# EAGLE board durtest3 (EAGLE 6.0)
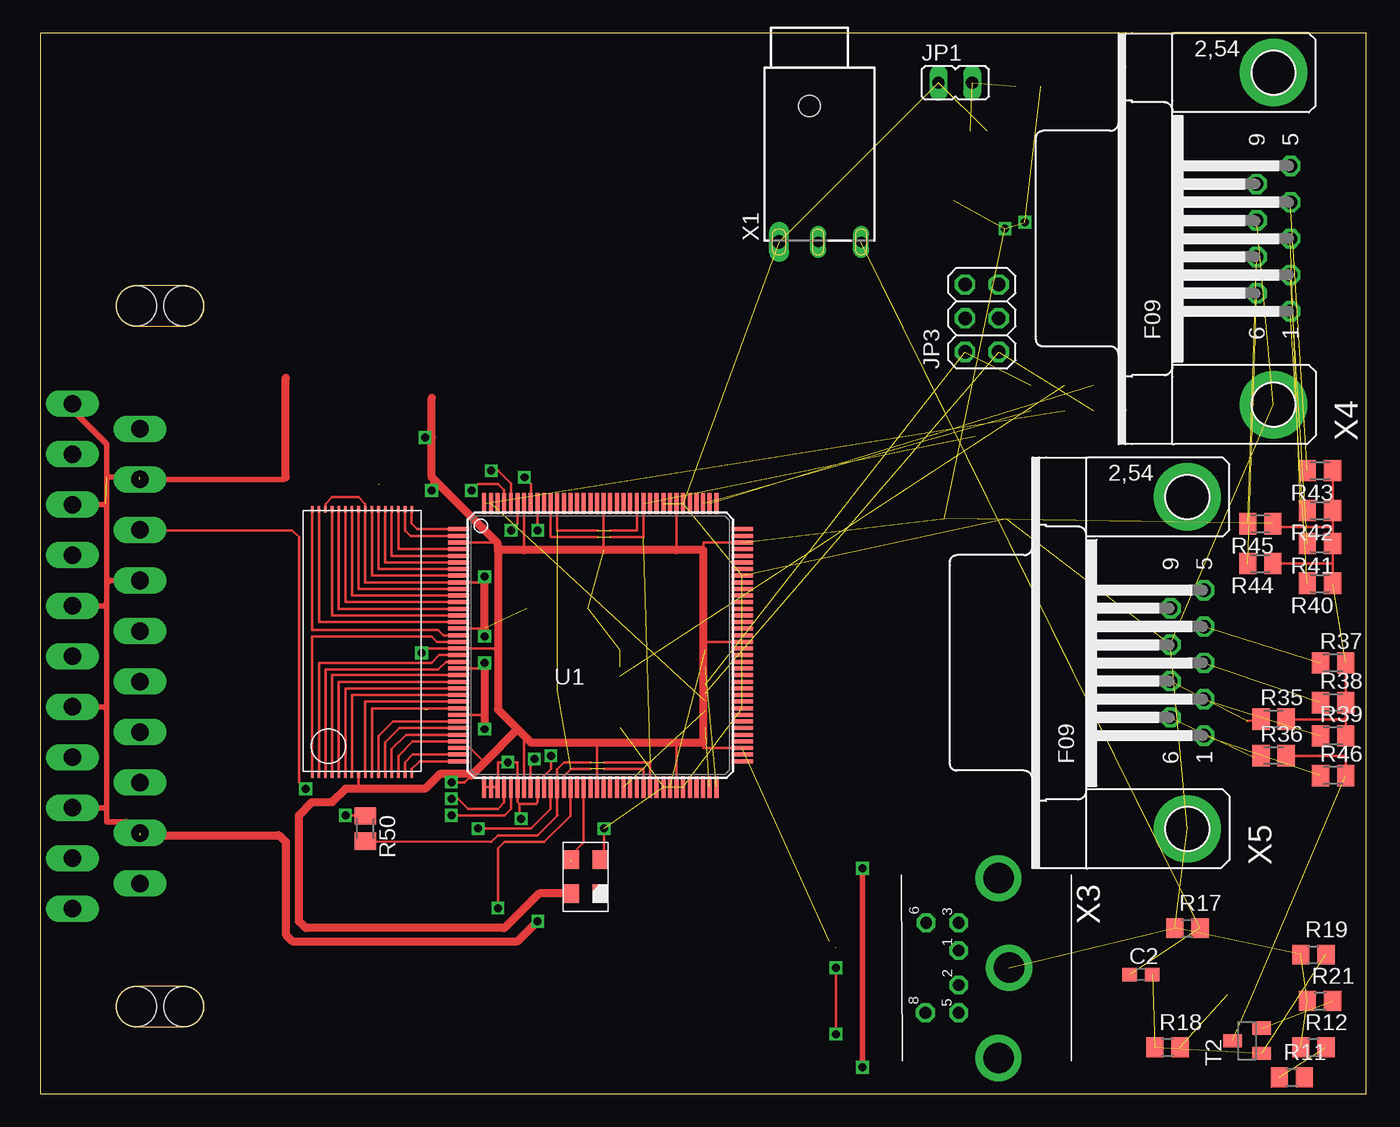
[diagram p0: board, top side]
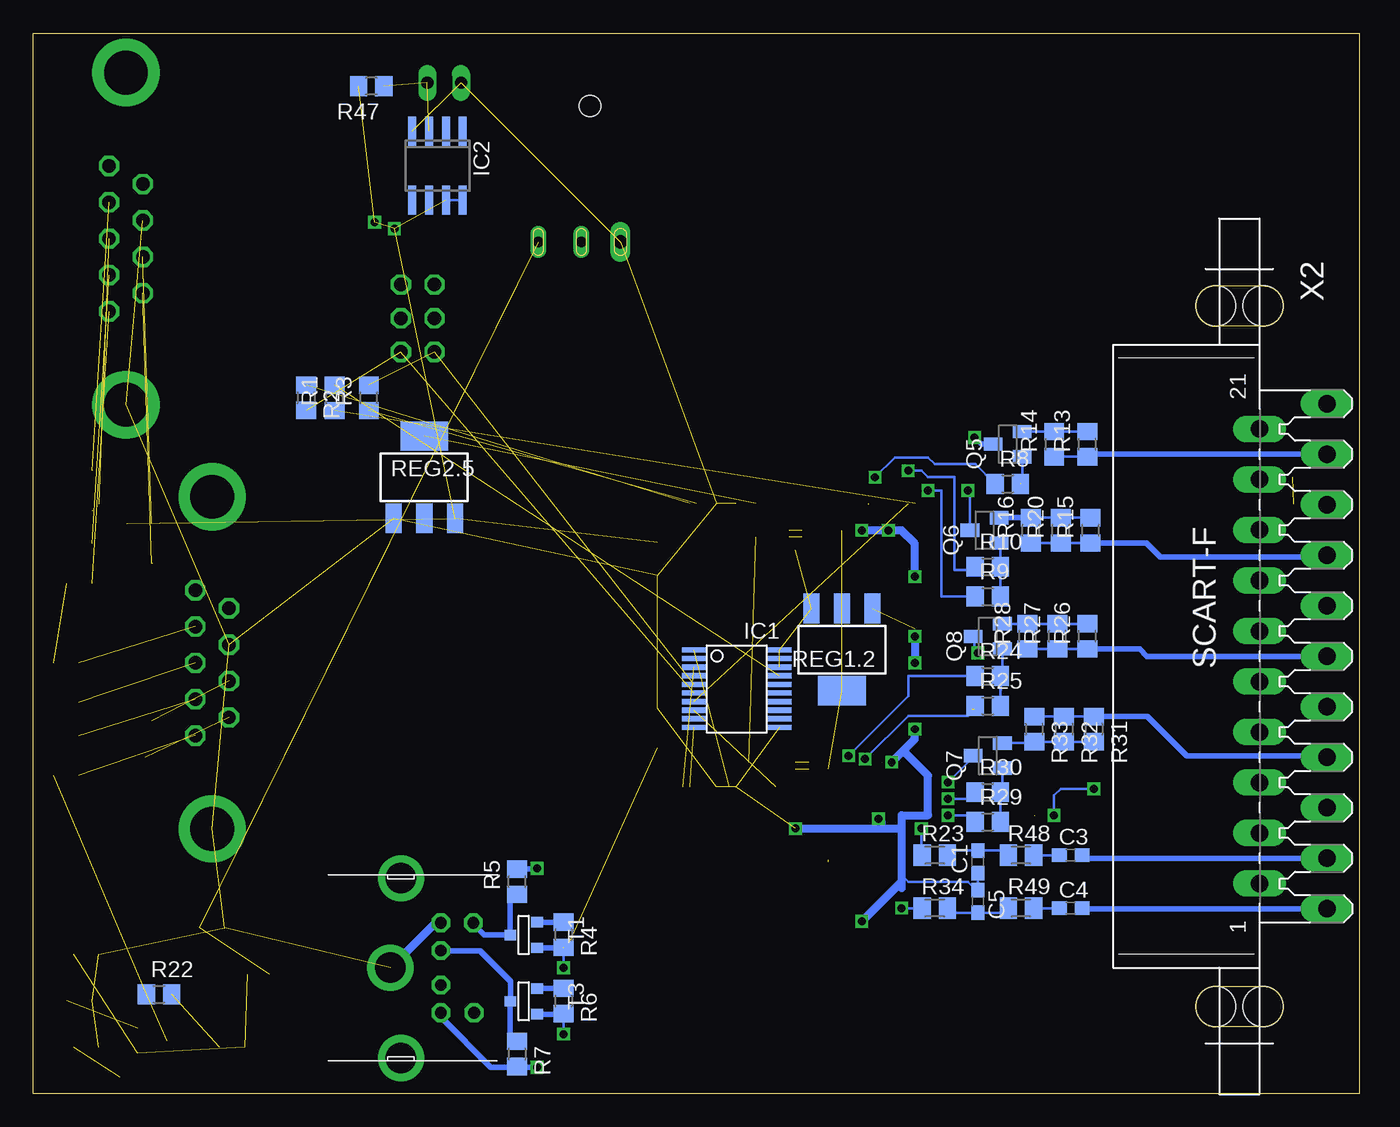
[diagram p1: board, bottom side, seen from below]

Size 100 x 80 mm. Coordinates in mm from the lower left corner, seen from the top.
Outline: 0,0 100,0 100,80 0,80 0,0
Copper layers (1*16): Top 0.0356mm / dielectric 1.5011mm / Bottom 0.0356mm
Design rules: minimum track width 6mil, minimum drill 13mil, track to track 6mil, track to pad 6mil, pad to pad 6mil, via to via 6mil, smd to smd 6mil, copper to edge 15mil, drill to drill 6mil, minimum pad ring 7mil, minimum via ring 7mil, stop-mask expansion 4mil, vias tented up to drill 0mil, thermal gap 10mil
Net classes: 1 power: width 0.6 mm, drill 1.1 mm, clearance 0.4 mm

## Footprints (pad centres in the part's own frame; a part is rotated, then mirrored left to right if it is on the bottom)
C0603 = smd 1.1 x 1: 1 -0.85,0; 2 0.85,0
VO20 = smd 0.4 x 1.8: 1 5.85,6.15; 2 5.2,6.15; 3 4.55,6.15; 4 3.9,6.15; 5 3.25,6.15; 6 2.6,6.15; 7 1.95,6.15; 8 1.3,6.15; 9 0.65,6.15; 10 0,6.15; 11 0,-0.3; 12 0.65,-0.3; 13 1.3,-0.3; 14 1.95,-0.3; 15 2.6,-0.3; 16 3.25,-0.3; 17 3.9,-0.3; 18 4.55,-0.3; 19 5.2,-0.3; 20 5.85,-0.3
SO-08 = smd 0.6 x 2.2: 1 -1.905,-2.6; 2 -0.635,-2.6; 3 0.635,-2.6; 4 1.905,-2.6; 5 1.905,2.6; 6 0.635,2.6; 7 -0.635,2.6; 8 -1.905,2.6
JP1 = drill 0.914 long: 1 0,-1.27; 2 0,1.27
2X03 = drill 1.016 octagon: 1 -2.54,-1.27; 2 -2.54,1.27; 3 0,-1.27; 4 0,1.27; 5 2.54,-1.27; 6 2.54,1.27
SOT23 = smd 1 x 1.4: 1 -0.95,-1.1; 2 0.95,-1.1; 3 0,1.1
R0805 = smd 1.3 x 1.5: 1 -0.95,0; 2 0.95,0
M0805 = smd 1.3 x 1.6: 1 -0.95,0; 2 0.95,0
SOT223 = smd 1.219 x 2.235: 1 -2.311,-3.099; 2 0,-3.099; 3 2.311,-3.099 | smd 3.6 x 2.2: 4 0,3.099
SOT-23 = smd 0.787 x 0.889: 1 0.025,-1.016; 2 -0.94,1.016; 3 0.991,1.016
TQ144 = smd 1.6 x 0.3: P1 -10.7,8.75; P2 -10.7,8.25; P3 -10.7,7.75; P4 -10.7,7.25; P5 -10.7,6.75; P6 -10.7,6.25; P7 -10.7,5.75; P8 -10.7,5.25; P9 -10.7,4.75; P10 -10.7,4.25; P11 -10.7,3.75; P12 -10.7,3.25; P13 -10.7,2.75; P14 -10.7,2.25; P15 -10.7,1.75; P16 -10.7,1.25; P17 -10.7,0.75; P18 -10.7,0.25; P19 -10.7,-0.25; P20 -10.7,-0.75; P21 -10.7,-1.25; P22 -10.7,-1.75; P23 -10.7,-2.25; P24 -10.7,-2.75; P25 -10.7,-3.25; P26 -10.7,-3.75; P27 -10.7,-4.25; P28 -10.7,-4.75; P29 -10.7,-5.25; P30 -10.7,-5.75; P31 -10.7,-6.25; P32 -10.7,-6.75; P33 -10.7,-7.25; P34 -10.7,-7.75; P35 -10.7,-8.25; P36 -10.7,-8.75; P73 10.7,-8.75; P74 10.7,-8.25; P75 10.7,-7.75; P76 10.7,-7.25; P77 10.7,-6.75; P78 10.7,-6.25; P79 10.7,-5.75; P80 10.7,-5.25; P81 10.7,-4.75; P82 10.7,-4.25; P83 10.7,-3.75; P84 10.7,-3.25; P85 10.7,-2.75; P86 10.7,-2.25; P87 10.7,-1.75; P88 10.7,-1.25; P89 10.7,-0.75; P90 10.7,-0.25; P91 10.7,0.25; P92 10.7,0.75; P93 10.7,1.25; P94 10.7,1.75; P95 10.7,2.25; P96 10.7,2.75; P97 10.7,3.25; P98 10.7,3.75; P99 10.7,4.25; P100 10.7,4.75; P101 10.7,5.25; P102 10.7,5.75; P103 10.7,6.25; P104 10.7,6.75; P105 10.7,7.25; P106 10.7,7.75; P107 10.7,8.25; P108 10.7,8.75 | smd 0.3 x 1.6: P37 -8.75,-10.7; P38 -8.25,-10.7; P39 -7.75,-10.7; P40 -7.25,-10.7; P41 -6.75,-10.7; P42 -6.25,-10.7; P43 -5.75,-10.7; P44 -5.25,-10.7; P45 -4.75,-10.7; P46 -4.25,-10.7; P47 -3.75,-10.7; P48 -3.25,-10.7; P49 -2.75,-10.7; P50 -2.25,-10.7; P51 -1.75,-10.7; P52 -1.25,-10.7; P53 -0.75,-10.7; P54 -0.25,-10.7; P55 0.25,-10.7; P56 0.75,-10.7; P57 1.25,-10.7; P58 1.75,-10.7; P59 2.25,-10.7; P60 2.75,-10.7; P61 3.25,-10.7; P62 3.75,-10.7; P63 4.25,-10.7; P64 4.75,-10.7; P65 5.25,-10.7; P66 5.75,-10.7; P67 6.25,-10.7; P68 6.75,-10.7; P69 7.25,-10.7; P70 7.75,-10.7; P71 8.25,-10.7; P72 8.75,-10.7; P109 8.75,10.7; P110 8.25,10.7; P111 7.75,10.7; P112 7.25,10.7; P113 6.75,10.7; P114 6.25,10.7; P115 5.75,10.7; P116 5.25,10.7; P117 4.75,10.7; P118 4.25,10.7; P119 3.75,10.7; P120 3.25,10.7; P121 2.75,10.7; P122 2.25,10.7; P123 1.75,10.7; P124 1.25,10.7; P125 0.75,10.7; P126 0.25,10.7; P127 -0.25,10.7; P128 -0.75,10.7; P129 -1.25,10.7; P130 -1.75,10.7; P131 -2.25,10.7; P132 -2.75,10.7; P133 -3.25,10.7; P134 -3.75,10.7; P135 -4.25,10.7; P136 -4.75,10.7; P137 -5.25,10.7; P138 -5.75,10.7; P139 -6.25,10.7; P140 -6.75,10.7; P141 -7.25,10.7; P142 -7.75,10.7; P143 -8.25,10.7; P144 -8.75,10.7
TSOP32 = smd 0.5 x 0.2: P1 -9.75,3.75; P2 -9.75,3.25; P3 -9.75,2.75; P4 -9.75,2.25; P5 -9.75,1.75; P6 -9.75,1.25; P7 -9.75,0.75; P8 -9.75,0.25; P9 -9.75,-0.25; P10 -9.75,-0.75; P11 -9.75,-1.25; P12 -9.75,-1.75; P13 -9.75,-2.25; P14 -9.75,-2.75; P15 -9.75,-3.25; P16 -9.75,-3.75; P17 10.25,-3.75; P18 10.25,-3.25; P19 10.25,-2.75; P20 10.25,-2.25; P21 10.25,-1.75; P22 10.25,-1.25; P23 10.25,-0.75; P24 10.25,-0.25; P25 10.25,0.25; P26 10.25,0.75; P27 10.25,1.25; P28 10.25,1.75; P29 10.25,2.25; P30 10.25,2.75; P31 10.25,3.25; P32 10.25,3.75
OSC_7C = smd 1.4 x 1.2: ENA -1.27,-1.1; GND 1.27,-1.1; OUT 1.27,1.1; VDD -1.27,1.1
1503_04 = drill 0.8 pad 1.2 long: 1 3.9,-10.25; 2 0.65,-10.25 | drill 1 pad 1.2 long: 3 -2.3,-10.25 | hole 1.6: 0,0
SCART-F = drill 1.321 long: 1 19.05,5.08; 2 17.145,0; 3 15.24,5.08; 4 13.335,0; 5 11.43,5.08; 6 9.525,0; 7 7.62,5.08; 8 5.715,0; 9 3.81,5.08; 10 1.905,0; 11 0,5.08; 12 -1.905,0; 13 -3.81,5.08; 14 -5.715,0; 15 -7.62,5.08; 16 -9.525,0; 17 -11.43,5.08; 18 -13.335,0; 19 -15.24,5.08; 20 -17.145,0; 21 -19.05,5.08 | hole 3.023: 26.416,0.254; 26.416,-3.302; -26.416,0.254; -26.416,-3.302
M_DIN6 = drill 0.9 pad 1.422 octagon: 1 -1.3,-3.75; 2 1.3,-3.75; 3 -3.4,-3.75; 5 3.4,-3.75; 6 -3.4,-6.2; 8 3.4,-6.25 | drill 2.3 pad 3.5: SH1 6.8,-0.75; SH2 0,0.05; SH3 -6.75,-0.75
F09HP = drill 1.016 octagon: 1 -5.486,-1.27; 2 -2.743,-1.27; 3 0,-1.27; 4 2.743,-1.27; 5 5.486,-1.27; 6 -4.115,1.27; 7 -1.372,1.27; 8 1.372,1.27; 9 4.115,1.27 | drill 3.302 pad 5.08: G1 -12.522,0; G2 12.522,0

## Placement (x,y rotation side)
C1  [C0603]  28.75,17.5 90 bottom
C2  100nF  [C0603]  83,9 0 top
C3  [C0603]  21.75,18 0 bottom
C4  [C0603]  21.75,14 0 bottom
C5  [C0603]  28.75,14.5 270 bottom
IC1  XCF02S  [VO20]  44.02,27.63 90 bottom
IC2  25LC080SN  [SO-08]  69.5,70 180 bottom
JP1  [JP1]  69,76.25 270 top
JP3  [2X03]  71,58.5 90 top
Q5  BC848SMD  [SOT23]  26.5,49 90 bottom
Q6  BC848SMD  [SOT23]  28.25,42.5 90 bottom
Q7  BC848SMD  [SOT23]  28,25.5 90 bottom
Q8  BC848SMD  [SOT23]  28,34.5 90 bottom
R1  100  [R0805]  77.25,52.49 90 bottom
R2  100  [R0805]  79.42,52.5 270 bottom
R3  100  [R0805]  74.68,52.49 90 bottom
R4  1000  [R0805]  60,12 270 bottom
R5  1000  [R0805]  63.5,16 90 bottom
R6  1000  [R0805]  60,7 270 bottom
R7  1000  [R0805]  63.5,3 270 bottom
R8  2200  [R0805]  26.5,46 0 bottom
R9  2200  [R0805]  28,37.5 0 bottom
R10  1000  [R0805]  28,39.75 0 bottom
R11  75  [R0805]  94.38,1.25 0 top
R12  750  [R0805]  96,3.5 0 top
R13  680  [R0805]  20.5,49 90 bottom
R14  2200  [R0805]  23,49 90 bottom
R15  270  [R0805]  20.25,42.5 90 bottom
R16  680  [R0805]  24.75,42.5 90 bottom
R17  10000  [R0805]  86.5,12.5 0 top
R18  4700  [R0805]  85,3.5 0 top
R19  10000  [R0805]  96,10.5 0 top
R20  4700  [R0805]  22.5,42.5 90 bottom
R21  47000  [R0805]  96.5,7 0 top
R22  1000  [R0805]  90.5,7.5 0 bottom
R23  [M0805]  32,18 0 bottom
R24  2200  [R0805]  28,31.5 0 bottom
R25  1000  [R0805]  28,29.25 0 bottom
R26  270  [R0805]  20.5,34.5 90 bottom
R27  680  [R0805]  22.75,34.5 90 bottom
R28  4700  [R0805]  25,34.5 90 bottom
R29  2200  [R0805]  28,20.5 0 bottom
R30  1000  [R0805]  28,22.75 0 bottom
R31  270  [R0805]  20,27.5 270 bottom
R32  680  [R0805]  22.25,27.5 270 bottom
R33  4700  [R0805]  24.5,27.5 270 bottom
R34  [M0805]  32,14 0 bottom
R35  [M0805]  93,28.25 0 top
R36  [M0805]  93,25.5 0 top
R37  [M0805]  97.5,32.5 0 top
R38  [M0805]  97.5,29.5 0 top
R39  [M0805]  97.5,27 0 top
R40  [M0805]  96.5,38.5 180 top
R41  [M0805]  96.5,41.5 180 top
R42  [M0805]  96.5,44 180 top
R43  [M0805]  96.5,47 180 top
R44  [M0805]  92,40 180 top
R45  [M0805]  92,43 180 top
R46  [M0805]  97.5,24 0 top
R47  4K7  [R0805]  74.5,76 180 bottom
R48  [M0805]  25.5,18 0 bottom
R49  [M0805]  25.5,14 0 bottom
R50  2k2  [M0805]  24.5,20 270 top
REG1.2  1.2V  [SOT223]  39,33.5 180 bottom
REG2.5  2.5V  [SOT223]  70.5,46.5 0 bottom
T1  BSS138  [SOT-23]  63,12 270 bottom
T2  BC848  [SOT23]  91,4 90 top
T3  BSS138  [SOT-23]  63,7 270 bottom
U1  XC3S400TQ144  [TQ144]  42.23,33.83 0 top
U$1  AS6C4008  [TSOP32]  24.25,33.83 90 top
U$2  TXO_7C  [OSC_7C]  41.12,16.38 90 top
X1  1503_04  [1503_04]  58,74.5 0 top
X2  SCART-F  [SCART-F]  7.5,33 270 bottom
X3  [M_DIN6]  73,9.5 270 top
X4  [F09HP]  93,64.5 90 top
X5  [F09HP]  86.5,32.5 90 top

## Library data of the parts
C1-C5 R23 R34-R46 R48-R50 = resistor
IC1 = smd-special
IC2 = microchip; MF: MICROCHIP; MPN: 25LC080/SN; OC_FARNELL: 1137302; OC_NEWARK: 96K4092
JP1 = jumper
JP3 = pinhead
Q5-Q8 = bc548
R1-R22 R24-R33 R47 = rcl
REG1.2 REG2.5 U$1 U$2 = cpcfpga
T1 T3 = zetex; OC_FARNELL: unknown; OC_NEWARK: unknown
T2 = transistor
U1 = xilinx_spartan3_virtex4_and_5
X1 = con-lumberg; OC_FARNELL: 1216981; OC_NEWARK: unknown
X2 = con-hirschmann; OC_FARNELL: unknown; OC_NEWARK: unknown
X3 = mini_din
X4 X5 = con-subd; OC_FARNELL: unknown; OC_NEWARK: unknown

## Nets
AINLEFT: X2.6
AINRIGHT: X2.2
B0: R30.1 U1.P40
B1: R29.1 U1.P41
CASIN: R21.2 T2.2
CLK_5V: R5.1 T1.1 X3.6
COMPIN: X2.20
CSYNC: R8.1 U1.P137
D_FASTBLANKING: R11.1 R12.2
DATA_5V: R7.1 T3.1 X3.1
FPGA_AUDIO_LEFT: R23.1 U1.P47
FPGA_AUDIO_RIGHT: R34.1 U1.P50
G0: R25.1 U1.P44
G1: R24.1 U1.P46
GND: C1.1 C5.1 IC1.11 IC2.4 JP1.1 R12.1 R17.1 R19.1 R21.1 REG1.2.1 REG2.5.1 U1.P9 U1.P16 U1.P22 U1.P29 U1.P37 U1.P38 U1.P39 U1.P42 U1.P45 U1.P64 U1.P67 U1.P81 U1.P88 U1.P94 U1.P101 U1.P114 U1.P117 U1.P136 U1.P139 U$1.P24 U$1.P30 U$2.GND X1.3 X2.4 X2.5 X2.9 X2.13 X2.14 X2.17 X2.18 X2.21 X3.3 X3.SH2 X4.8 X4.G1 X5.8 X5.G1
N$1: U1.P1 U$1.P17
N$2: U1.P2 U$1.P18
N$3: U1.P4 U$1.P19
N$4: U1.P5 U$1.P20
N$5: U1.P6 U$1.P21
N$6: U1.P7 U$1.P22
N$7: U1.P8 U$1.P23
N$8: U1.P10 U$1.P25
N$9: U1.P11 U$1.P26
N$10: U1.P12 U$1.P27
N$11: U1.P13 U$1.P28
N$12: U1.P14 U$1.P29
N$13: U1.P15 U$1.P31
N$14: U1.P17 U$1.P32
N$15: U1.P18 U$1.P1
N$16: U1.P20 U$1.P2
N$17: U1.P21 U$1.P3
N$18: U1.P23 U$1.P4
N$19: U1.P24 U$1.P5
N$20: U1.P25 U$1.P6
N$21: U1.P26 U$1.P7
N$22: U1.P27 U$1.P9
N$23: U1.P28 U$1.P10
N$24: U1.P30 U$1.P11
N$25: U1.P31 U$1.P12
N$26: U1.P32 U$1.P13
N$27: U1.P33 U$1.P14
N$28: U1.P35 U$1.P15
N$29: U1.P36 U$1.P16
N$30: R35.1 X5.7
N$31: R36.1 X5.6
N$32: R37.1 X5.4
N$33: R38.1 X5.3
N$34: R39.1 X5.2
N$35: IC1.3 U1.P72
N$36: IC1.17 R1.2
N$37: R46.1 X5.1
N$38: IC1.10 U1.P71
N$39: R2.1 U1.P110
N$40: IC1.7 U1.P143
N$41: R40.2 X4.1
N$42: R1.1 U1.P144
N$43: R3.1 U1.P111
N$44: R41.2 X4.2
N$45: R42.2 X4.3
N$46: R43.2 X4.4
N$47: R44.2 X4.6
N$48: R45.2 X4.7
N$49: IC2.3 JP1.2 R47.1
N$50: U1.P52 U$2.OUT
N$51: C1.2 R23.2 R48.1
N$52: C3.1 R48.2
N$53: Q6.1 R9.2 R10.2
N$54: Q6.2 R15.2 R16.2 R20.2
N$55: Q8.1 R24.2 R25.2
N$56: Q8.2 R26.2 R27.2 R28.2
N$57: Q7.1 R29.2 R30.2
N$58: Q7.2 R31.2 R32.2 R33.2
N$59: Q5.2 R13.2 R14.2
N$60: C2.2 R18.1 R19.2 T2.1
N$61: C2.1 R17.2 X1.1
N$62: R18.2 R22.2
N$63: Q5.1 R8.2
N$64: C4.1 R49.2
N$65: C5.2 R34.2 R49.1
N$68: JP3.3
N$69: JP3.5
N$70: JP3.6
N$72: JP3.4
PE1: X3.SH1
PE3: X3.SH3
PROM_DO: IC1.1 U1.P65
PROM_INITB: IC1.8 U1.P58
PS2CLK: R4.1 T1.2
PS2DAT: R6.1 T3.2
R0: R10.1 U1.P140
R1: R9.1 U1.P141
SCART_BLANKING: R50.1 X2.16
SCART_BLUE: R31.1 R32.1 R33.1 X2.7
SCART_COMP: R13.1 R14.1 X2.19
SCART_GREEN: R26.1 R27.1 R28.1 X2.11
SCART_LEFT: C3.2 X2.3
SCART_MODE: X2.8
SCART_RED: R15.1 R16.1 R20.1 X2.15
SCART_RIGHT: C4.2 X2.1
SPI_CLK: IC2.6
SPI_DI: IC2.5
SPI_DO: IC2.2
SPI_SEL0: IC2.1
TCK: IC1.6 JP3.1 R2.2
TDI: IC1.4
TDO: U1.P109
TMS: IC1.5 JP3.2 R3.2
VCC: IC1.18 IC1.19 IC1.20 IC2.7 IC2.8 Q5.3 Q6.3 Q7.3 Q8.3 R4.2 R6.2 R22.1 R35.2 R36.2 R37.2 R38.2 R39.2 R40.1 R41.1 R42.1 R43.1 R44.1 R45.1 R46.2 R47.2 REG1.2.3 REG2.5.3 T1.3 T2.3 T3.3 U1.P3 U1.P19 U1.P34 U1.P43 U1.P54 U1.P66 U1.P75 U1.P91 U1.P106 U1.P115 U1.P126 U1.P138 U$1.P8 U$2.VDD
VCC_5V: R5.2 R7.2 X3.5
VCC_B3: R11.2
VCCAUX: R50.2 REG2.5.4 U1.P48 U1.P62 U1.P120 U1.P134
VCCINT: REG1.2.4 U1.P49 U1.P61 U1.P121 U1.P133

## Tracks (layer width: path | path; a pad name or v marks a point on that pad's centre or on a via)
B0  (via drill 0.6)
  Top 0.2: U1.P40 34.98,21.98 34.5,21.5 32.25,21.5 31.5,22.25 v31,22.25
  Bottom 0.2: 28.95,22.5 R30.1 29.45,22.25 v31,22.25
B1  (via drill 0.6)
  Top 0.2: U1.P41 35.48,21.48 35,21 v31,21
  Bottom 0.2: 29.45,21 R29.1 28.95,21 v31,21
CASIN  (1 unrouted)
CLK_5V
  Bottom 0.3: 64.02,14.53 R5.1
  Bottom 0.4: X3.6 66.8,12.8 66,12 64.04,12 T1.1 64.02,14.53
CSYNC  (via drill 0.6)  (1 unrouted)
  Top 0.2: 37,44.5 37,46 v36.5,46.5
  Bottom 0.2: 27.45,46.5 R8.1 28.95,47.5 32,47.5 32.5,48 35,48 v36.5,46.5
D_FASTBLANKING  (1 unrouted)
DATA_5V
  Bottom 0.4: R7.1 64.02,4.47 T3.1 64,6.99 64,8.5 66.3,10.8 X3.1
FPGA_AUDIO_LEFT  (via drill 0.6)
  Top 0.2: U1.P47 38.48,21.48 37,20 v33,20
  Bottom 0.2: R23.1 33,18.05 v33,20
FPGA_AUDIO_RIGHT  (via drill 0.6)
  Top 0.2: U1.P50 39.98,20.98 38,19 35,19 34.5,18.5 v34.5,14
  Bottom 0.2: v34.5,14 R34.1
G0  (via drill 0.6)  (1 unrouted)
  Top 0.2: U1.P44 36.98,24.98 v37.25,25.25
  Bottom 0.2: 29.2,29 R25.1 | v37.25,25.25 34,28.5 29.5,28.5 29,29
G1  (via drill 0.6)
  Top 0.2: U1.P46 37.98,23.98 38.5,24.5 v38.5,25.5
  Bottom 0.2: v38.5,25.5 34,30 34,31.5 R24.1
GND  (via drill 0.6)  (27 unrouted)
  Top 0.2: U$1.P30 21.5,44.5 22,45 24,45 24.5,44.5 U$1.P24 24.5,38.58 U1.P9 33.5,38.58 33.5,38.5 | U1.P16 33.5,35.08 33.5,35 | U1.P22 33.5,32.08 33.5,32 | U1.P29 33.5,28.58 | U1.P37 U1.P38 U1.P39 34.5,23.16 34.5,25 v35.25,25 36,25 | U1.P45 37.5,23.11 37.5,22 37.38,21.88 36.12,21.88 | 36,23.16 U1.P42 | U1.P42 35.98,24.98 | 36.12,21.88 36,22 36,23.11 U1.P42 | v37.5,42.5 37.5,44.51 U1.P136 | U1.P139 35.98,43.02 v35.5,42.5 | 36.12,21.88 36.12,20.88 v36.25,20.75 | 18.34,46.34 18.5,46.5 | v42.5,20 42.5,17.92 U$2.GND
  Top 0.4: X2.21 2.42,51.58 5,49 5,46.5 | 5,46.5 5,38.5 5.21,38.72 X2.14 | 5,46.5 7.5,46.5 | 9.84,46.34 18.34,46.34
  Top 0.406: X2.18 9.84,46.34 | 5,38.5 5,37 | 5,37 5,29 | 5,29 5,21.5 | 5,21.5 5,20.5 6.5,20.5 7.5,19.5 | X2.13 4.81,36.81 5,37 | X2.9 4.81,29.19 5,29 | 4.93,44.43 4.93,44.5 4.86,44.43 X2.17 | X2.5 4.93,21.57 5,21.5
  Top 0.6: 33.5,35 v33.5,34.5 | v33.5,32.5 33.5,32 33.5,28.58 v33.5,27.5 | 33.5,35.08 33.5,38.5 | 33.5,38.58 v33.5,39 | 18.5,46.5 18.5,54 | 7.5,19.5 18,19.5 18.5,19 18.5,12 19,11.5 36,11.5 v37.5,13
  Bottom 0.2: C5.1 28.85,15.35 29,15.5 | 29,15.5 29.5,16 34,16 34.5,16.5 | v36.25,20.75 36.25,20.5 | C1.1 28.75,15.75 28.5,15.5 29,15.5
  Bottom 0.6: v33.5,34.5 v33.5,32.5 | X3.3 69.65,12.9 X3.SH2 | v35.25,25 34.5,25.75 | 34.5,25.75 33.5,26.75 v33.5,27.5 | 34.5,20 34.5,21 32.5,21 32.5,24 34.25,25.75 34.5,25.75 | 34.5,20 34.5,16.5 34.5,16 | v33.5,39 33.5,41.5 34.5,42.5 v35.5,42.5 v37.5,42.5 | 34.5,16 34.5,15.5 | 36,20 36,20.5 v36.25,20.75 | v37.5,13 34.5,16 | v42.5,20 34.5,20
N$1
  Top 0.2: U1.P1 28.42,42.58 28,43 U$1.P17
N$2
  Top 0.2: U1.P2 27.92,42.08 27.5,42.5 U$1.P18
N$3
  Top 0.2: U1.P4 27,41.08 U$1.P19
N$4
  Top 0.2: U1.P5 26.5,40.58 U$1.P20
N$5
  Top 0.2: U1.P6 26,40.08 U$1.P21
N$6
  Top 0.2: U1.P7 25.5,39.58 U$1.P22
N$7
  Top 0.2: U1.P8 25,39.08 U$1.P23
N$8
  Top 0.2: U1.P10 24,38.08 U$1.P25
N$9
  Top 0.2: U1.P11 23.5,37.58 U$1.P26
N$10
  Top 0.2: U1.P12 23,37.08 U$1.P27
N$11
  Top 0.2: U1.P13 22.5,36.58 U$1.P28
N$12
  Top 0.2: U1.P14 22,36.08 U$1.P29
N$13
  Top 0.2: U1.P15 21,35.58 U$1.P31
N$14
  Top 0.2: U1.P17 30.42,34.58 30,35 20.5,35 U$1.P32
N$15
  Top 0.2: U$1.P1 20.5,34.5 29.5,34.5 29.92,34.08 U1.P18
N$16
  Top 0.2: U$1.P2 21,32.5 29.5,32.5 30.08,33.08 U1.P20
N$17
  Top 0.2: U$1.P3 21.5,32 30,32 30.58,32.58 U1.P21
N$18
  Top 0.2: U1.P23 22,31.58 U$1.P4
N$19
  Top 0.2: U1.P24 22.5,31.08 U$1.P5
N$20
  Top 0.2: U1.P25 23,30.58 U$1.P6
N$21
  Top 0.2: U1.P26 23.5,30.08 U$1.P7
N$22
  Top 0.2: U1.P27 24.5,29.58 U$1.P9
N$23
  Top 0.2: U1.P28 25,29.08 U$1.P10
N$24
  Top 0.2: U1.P30 26.58,28.08 25.5,27 U$1.P11
N$25
  Top 0.2: U1.P31 27.08,27.58 26,26.5 U$1.P12
N$26
  Top 0.2: U1.P32 27.58,27.08 26.5,26 U$1.P13
N$27
  Top 0.2: U$1.P14 27,25.5 28.08,26.58 U1.P33
N$28
  Top 0.2: U1.P35 28.08,25.58 27.5,25 U$1.P15
N$29
  Top 0.2: U1.P36 28.58,25.08 28,24.5 U$1.P16 28,24
N$30  (1 unrouted)
  Top 0.2: 91.05,28.13 R35.1
N$31  (1 unrouted)
  Top 0.2: 91.55,25.39 R36.1
N$32  (1 unrouted)
N$33  (1 unrouted)
N$34  (1 unrouted)
  Top 0.2: 96.55,26.88 R39.1
N$35  (1 unrouted)
N$36  (1 unrouted)
N$37  (1 unrouted)
N$38  (1 unrouted)
N$39  (1 unrouted)
N$40  (1 unrouted)
N$41  (1 unrouted)
  Top 0.2: 95.54,38.51 R40.2
N$42  (1 unrouted)
N$43  (1 unrouted)
N$44  (1 unrouted)
  Top 0.2: 95.31,41.26 R41.2
N$45  (2 unrouted)
  Top 0.2: 95,44.5 95.5,44
N$46  (2 unrouted)
  Top 0.2: 95.24,46.74 95.5,47
N$47  (2 unrouted)
  Top 0.2: 90.89,39.88 91,40
N$48  (1 unrouted)
N$49  (2 unrouted)
N$50  (1 unrouted)
  Top 0.2: U1.P52 40.98,18.98 40,18 40,17.5
N$51
  Bottom 0.2: R23.2 30.7,18.35 C1.2 26.8,18.35 R48.1
N$52
  Bottom 0.2: R48.2 C3.1
N$53
  Bottom 0.2: Q6.1 27.05,41.55 R10.2 R9.2
N$54
  Bottom 0.2: R15.2 R20.2 R16.2
  Bottom 0.4: Q6.2 25.05,43.45 25,43.5 24.8,43.5 R16.2
N$55
  Bottom 0.2: Q8.1 26.9,31.6 27,31.5 R25.2 R24.2
N$56
  Bottom 0.2: R26.2 R27.2 R28.2 Q8.2
N$57
  Bottom 0.2: R29.2 R30.2 26.9,22.75 Q7.1
N$58
  Bottom 0.2: Q7.2 24.5,26.45 R33.2 R32.2 R31.2
N$59
  Bottom 0.2: R13.2 R14.2 Q5.2
N$60  (3 unrouted)
N$61  (2 unrouted)
N$62  (1 unrouted)
N$63  (1 unrouted)
  Bottom 0.2: Q5.1 25.4,46.1 25.5,46
N$64
  Bottom 0.2: C4.1 R49.2
N$65
  Bottom 0.2: R49.1 26.8,13.65 C5.2 30.7,13.65 R34.2
PROM_DO  (1 unrouted)
PROM_INITB  (1 unrouted)
PS2CLK
  Bottom 0.4: T1.2 R4.1
PS2DAT
  Bottom 0.4: R6.1 T3.2
R0  (via drill 0.6)
  Top 0.2: U1.P140 35.48,46.02 34.5,47 v34,47
  Bottom 0.2: v34,47 33,47 32.5,46.5 30.5,46.5 30.5,39.5 28.95,39.5 R10.1 29.2,40
R1  (via drill 0.6)
  Top 0.2: U1.P141 34.98,45.52 34.5,46 33,46 v32.5,45.5
  Bottom 0.2: R9.1 31.5,37.5 31.5,45.5 v32.5,45.5
SCART_BLANKING  (via drill 0.6)  (1 unrouted)
  Top 0.2: v20,23 19.5,23.5 19.5,42 19,42.5 7.53,42.5 X2.16 | v23,21 24.5,21
  Bottom 0.2: v20,23 22.5,23 23,22.5 v23,21
SCART_BLUE
  Bottom 0.2: R31.1 R32.1 R33.1
  Bottom 0.4: R31.1 15.95,28.45 13,25.5 2.54,25.5 X2.7
SCART_COMP
  Bottom 0.2: R14.1 R13.1 20.5,48
  Bottom 0.4: X2.19 20.26,48.24 20.5,48
SCART_GREEN
  Bottom 0.2: R28.1 R27.1 R26.1
  Bottom 0.4: R26.1 16.55,33.55 16,33 X2.11
SCART_LEFT
  Bottom 0.2: 20.66,17.76 C3.2
  Bottom 0.4: X2.3 20.66,17.76
SCART_RED
  Bottom 0.2: R15.1 R20.1 R16.1
  Bottom 0.4: R15.1 16.05,41.55 15,40.5 2.54,40.5 X2.15
SCART_RIGHT
  Bottom 0.2: 20.85,13.95 C4.2
  Bottom 0.4: X2.1 20.85,13.95
TCK  (2 unrouted)
TMS  (2 unrouted)
VCC  (via drill 0.6)  (15 unrouted)
  Top 0.2: R46.2 98.45,25.5 | 98.45,25.5 R39.2 98.45,28.25 | 98.45,28.25 R38.2 R37.2 | R35.2 98.45,28.25 | R36.2 98.45,25.5 | R40.1 97.45,40 | 97.45,40 R41.1 97.45,42.62 | 97.45,42.62 R42.1 R43.1 | R44.1 97.45,40 | R45.1 93.38,43 93.62,42.75 97.33,42.75 97.45,42.62 | 36.5,23.13 U1.P43 36.48,26.98 36.5,27 | 34.5,33.5 34.5,33.58 U1.P19 29.08,33.58 v28.75,33.25 | v60,9.5 v60,4.5 | U1.P126 42.48,41.52 42.5,41 | U1.P54 41.98,25.98 42,26.5 | U1.P66 47.98,25.98 48,26.5 | U1.P75 50,26.08 50,26.5 | U1.P106 50,41.58 50,41 | U1.P91 50,34.08 50,34 | U1.P115 47.98,41.52 48,41 | U1.P34 32.42,26.08 33.5,25 | U1.P138 36.48,41.02 36.5,41 | U1.P3 34.42,41.58 34.5,41.5 | v29.5,45.5 29.5,46.5 | v29,49.5 29.5,49.5 | v31,23.5 32,23.5 32.5,24 | U$1.P8 24,23
  Top 0.6: 36,27.5 34.5,29 34.5,33.5 34.5,41 | 36,27.5 36.5,27 37,26.5 42,26.5 48,26.5 50,26.5 50,34 50,41 48,41 42.5,41 36.5,41 34.5,41 | 32.62,24.12 33.5,25 36,27.5 | 34.5,41 34.5,41.5 29.5,46.5 29.5,49.5 29.5,52.5 | 32.5,24 32.62,24.12 | 32.62,24.12 30.12,24.12 29,23 24,23 23,23 22,22 20.5,22 19.5,21 19.5,13 20,12.5 35,12.5 37.6,15.11 U$2.VDD
  Bottom 0.2: 59.55,11.05 59.55,11.45 59.5,11.5 | 60.01,11.01 v60.01,9.51 v60,9.5 | v60,4.5 R6.2 | IC2.7 IC2.8 | Q8.3 29.5,34.5 29,34 29,33.5 v28.75,33.25 | Q7.3 29.1,25.4 v31,23.5 | Q6.3 29.35,45.35 v29.5,45.5 | Q5.3 27.6,48.9
  Bottom 0.4: T1.3 60.01,11.01 60,11 | T3.3 60.04,6.01 R6.2 | R4.2 59.55,11.05 59.5,11 | Q5.3 28.5,49 v29,49.5
  other vias: 74.25,65.75 72.75,65.25
VCC_5V  (via drill 0.6)
  Top 0.4: v62,17 v62,2
  Bottom 0.4: X3.5 69.25,5.75 65.5,2 63.55,2 R7.2 63.5,2 v62,2 | R5.2 62.05,16.95 v62,17
VCCAUX  (4 unrouted)
  Top 0.2: 46,23.16 U1.P62 45.98,24.98 46,25 42.5,25 | 41.5,25 39.5,25 38.98,24.48 U1.P48 38.98,21.02 39,21 37.5,19.5 34.5,19.5 34,19 R50.2 | U1.P134 38.48,42.02 38.5,42 42,42 | U1.P120 45.48,42.02 45.5,42 43,42
VCCINT  (4 unrouted)
  Top 0.2: U1.P49 39.48,23.98 40,24.5 41.5,24.5 | U1.P61 45.48,24.48 45.5,24.5 42.5,24.5 | U1.P133 38.98,42.52 39,42.5 42,42.5 | U1.P121 44.98,42.52 45,42.5 43,42.5